# Altium PCB MAINSSMB V1.4 .PcbDoc (part 2 of 2)
Units mm, origin at the board's own origin, x right, y up, seen from the top; angles counter-clockwise.
Board outline 44.2 x 69.93 mm, 2 copper layers (Top Layer, Bottom Layer), stack 1.671 mm thick; 41 components, 30 nets, 189 pads, 41 vias.
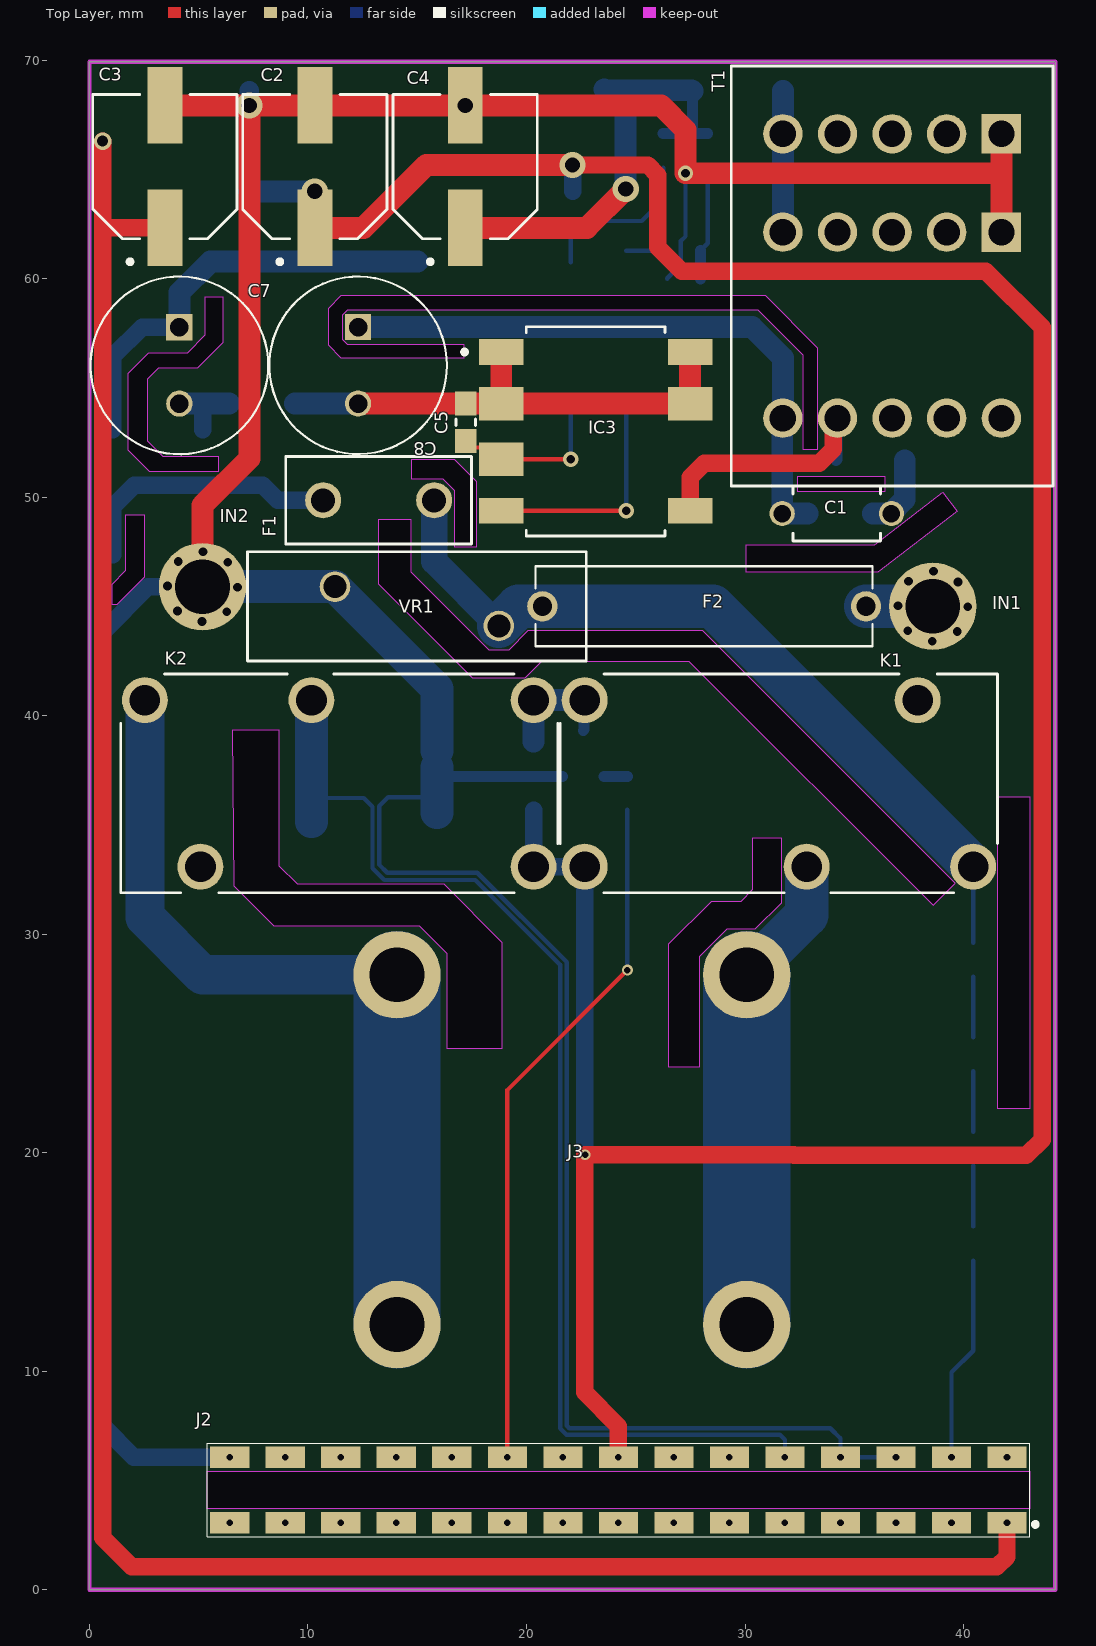
[diagram p0: Top Layer view]

## Part data (continued)
VR1: "Var MOV 275VAC/350VDC 4500A 430V Thru-Hole Radial Automotive Bulk", Manufacturer="TDK EPCOS", Manufacturer Part Number=B72214S0271K101, Supplier Part Number=495-1412-ND, Category=Varistors, ComponentLink1Description=https://datasheet.ciiva.com/11834/0900766b80188ddb-11834422.pdf?src-supplier=Rs, ComponentLink1URL=https://datasheet.ciiva.com/11834/0900766b80188ddb-11834422.pdf?src-supplier=Rs, ComponentLink2Description=https://datasheet.ciiva.com/4540/siov-leaded-standard-4540892.pdf?src-supplier=Mouser, ComponentLink2URL=https://datasheet.ciiva.com/4540/siov-leaded-standard-4540892.pdf?src-supplier=Mouser, ComponentLink3Description=https://datasheet.ciiva.com/1278/1899727-1278041.pdf?src-supplier=Element14, ComponentLink3URL=https://datasheet.ciiva.com/1278/1899727-1278041.pdf?src-supplier=Element14, Pricing="1=0.76, 10=0.46, 25=0.3804, 100=0.2902, 250=0.24588, 500=0.21856, 1000=0.19569, 2500=0.17105, 5000=0.15589 (USD)", RoHS=Yes, Stock=42424, Supplier=Digikey

## Via types
v1: diameter 0.5, hole 0.3, Top Layer to Bottom Layer, 32 vias
v2: diameter 1.2, hole 0.7, Top Layer to Bottom Layer, tented both sides, 5 vias
v3: diameter 0.7, hole 0.4, Top Layer to Bottom Layer, tented both sides, 3 vias
v4: diameter 0.8, hole 0.5, Top Layer to Bottom Layer, tented both sides, 1 vias

## Nets (pads, with @x,y where several pads share a name; then routed paths per layer and width w, separated by ;. In a path a pad name is that pad's centre, name@x,y a point inside that pad or via, vN(x,y) a via of type N, cw(c..) or ccw(c..) an arc to the next point about the centre after c; other vN are vias at no path point)
3V3-MAIN: C3.1 IC1.4 J2.01 | length 110.5
  Top Layer w0.8: v4(0.6,66.294) 0.6,62.281 ; C3.1 0.645,62.326 0.6,62.281 ; v1(41.986,3.071) 41.986,1.528 41.518,1.059 1.928,1.059 0.6,2.387 0.6,62.281
5V-MAIN: C2.1 D5.K IC1.3 IC7.3 J2.16 K1.A2 K2.A1 | length 136.4
  Top Layer w0.8: v2(22.106,65.202) 25.541,65.202 26.01,64.733 26.01,61.443 27.102,60.35 41.021,60.35 43.596,57.775 43.596,20.609 42.875,19.888 32.258,19.888 32.233,19.914 v1(22.682,19.914) 22.657,19.888 22.657,9.042 24.206,7.493 v1(24.206,6.071)
  Top Layer w1: v2(10.312,63.994) C2.1 12.542,62.326 15.418,65.202 v2(22.106,65.202)
  Bottom Layer w0.8: D5.K K2.A1 K1.A2 22.657,19.939 v1(22.682,19.914) ; IC7.3 v2(22.106,65.202)
  Bottom Layer w1: IC1.3 v2(10.312,63.994)
CUR-SHT-1: J2.10 K2.COM R17.2 R19.2 | length 54.9
  Bottom Layer w0.2: R19.2 10.16,35.529 10.87,36.239 12.554,36.239 12.954,35.839 12.954,33.02 13.487,32.487 17.653,32.487 21.537,28.603 21.537,7.394 21.829,7.101 31.596,7.101 31.826,6.871 v1(31.826,6.071)
  Bottom Layer w1.5: R19.2 10.16,36.239 R17.2 K2.COM
LEAK_INT: J2.18
  other v1: 21.666,6.071
NetC1_1: C1.1 D3.K R1.1 | length 3.5
  Bottom Layer w1: R1.1@35.862,49.251 C1.1 36.699,49.291 37.308,49.9 D3.K
NetC4_1: C4.1 D2.1 IC7.1 R2.2 R3.2 | length 20.7
  Top Layer w1: C4.1 22.76,62.326 v2(24.536,64.102)
  Bottom Layer w0.5: R2.2 R3.2 ; 27.598,66.675 D2.1
  Bottom Layer w1: IC7.1@23.554,68.67 23.599,68.625 24.46,68.625 ; v2(24.536,64.102) 24.536,68.549 24.46,68.625 ; D2.1 27.553,68.625 24.46,68.625
NetC5_1: C5.1 IC3.3 IC4.4 | length 8.1
  Top Layer w0.2: C5.1 17.53,52.273 18.316,52.273 IC3.3 v3(22.022,51.742)
  Bottom Layer w0.2: IC4.4 22.022,51.816 v3@22.073,51.765
NetC9_1: C9.1 IC4.2 IC5.2 | length 2.8
  Bottom Layer w0.2: IC4.2@24.562,61.282 C9.1 IC5.2
NetC9_2: C9.2 IC5.1 R3.1 R4.2 | length 5.3
  Bottom Layer w0.2: C9.2 28.292,61.622 IC5.1 R3.1
  Bottom Layer w0.5: R4.2 C9.2
NetD1_AC1: D1.AC1 F1.2 | length 12.5
  Bottom Layer w0.8: D1.AC1 1.074,49.563 2.057,50.546 7.925,50.546 8.611,49.86 F1.2
NetD2_2: D2.2 T1.5 | length 6.5
  Bottom Layer w1: T1.5@31.728,62.128 31.728,66.628 D2.2
NetD3_A: D3.A IC3.5 T1.7 | length 12.1
  Top Layer w0.8: IC3.5 27.483,50.916 28.126,51.559 33.394,51.559 34.037,52.202 34.037,53.427 T1.7
  Bottom Layer w0.5: D3.A 34.198,51.719 34.198,53.588 T1.7
NetD5_A: D5.A K1.A1 K2.A2 Q1.3 | length 5.6
  Bottom Layer w0.5: Q1.3 22.626,39.361 22.626,40.686 K1.A1
  Bottom Layer w1: D5.A K2.A2 K1.A1
NetF2_1: F2.1 IN1.1 | length 3.1
  Bottom Layer w2: F2.1 IN1.1@38.593,45.009
NetIC3_4: IC3.4 IC4.3 | length 11.2
  Top Layer w0.2: IC3.4 v3(24.562,49.38) ; v3@24.47,49.472 24.553,49.555 v3@24.689,49.555
  Bottom Layer w0.2: IC4.3 24.562,49.611 24.618,49.555 v3@24.689,49.555
NetIC4_1: IC4.1 R2.1 | length 7.8
  Bottom Layer w0.2: IC4.1 22.022,62.357 22.301,62.636 25.273,62.636 26.252,63.615 R2.1
NetJ3_1: J3.1 J3.3 K2.NO | length 38.6
  Bottom Layer w1.8: K2.NO 2.54,30.785 5.183,28.142 J3.1
  Bottom Layer w4: J3.3 J3.1
NetJ3_2: J3.2 J3.4 K1.COM | length 22.1
  Bottom Layer w2: J3.2 32.817,30.886 K1.COM
  Bottom Layer w4: J3.4 J3.2
NetQ1_1: Q1.1 R21.2 | length 1.1
  Bottom Layer w0.5: Q1.1 R21.2
NetR5_1: R5.1 R7.1 | length 2.8
  Bottom Layer w0.2: R5.1 R7.1
NetR5_2: R5.2 R6.1 | length 2.8
  Bottom Layer w0.2: R6.1 R5.2
NetR7_2: R7.2 R8.2 | length 2.8
  Bottom Layer w0.2: R7.2 R8.2
POWER-300V: C7.1 D1.POS L1.1 | length 20
  Bottom Layer w0.8: D1.POS 1.074,53.292 1.074,56.446 2.41,57.782 C7.1
  Bottom Layer w1: C7.1 4.115,59.36 5.537,60.782 L1.1
POWER-300V-R: C1.2 C8.1 L1.2 R1.2 T1.6 | length 28.3
  Bottom Layer w1: C8.1 12.295,57.784 15.01,57.784 L1.2 30.33,57.782 31.728,56.384 T1.6 ; T1.6@31.699,53.589 C1.2 R1.2@32.871,49.251
POWER-GND: C7.2 D1.NEG L2.1 | length 3.5
  Bottom Layer w0.8: D1.NEG 5.174,53.292 5.174,54.282
  Bottom Layer w1: C7.2 5.174,54.282 L2.1
POWER-GND-R: C5.2 C8.2 IC3.1 IC3.2 IC3.7 IC3.8 L2.2 | length 22.8
  Top Layer w1: C8.2 12.296,54.282 C5.2 IC3.2 ; IC3.1 IC3.2 ; IC3.8 IC3.7 IC3.2
  Bottom Layer w1: L2.2 9.402,54.285 C8.2
POWER_L: C2.2 C3.2 C4.2 D1.AC2 IC1.1 IC5.3 IC7.2 IN2.1 J2.06 J2.08 J2.30 Q1.2 R4.1 R17.1 R19.1 T1.1 VR1.1 | length 199.5
  Top Layer w1: C3.2 v2(7.317,67.926) ; IN2.1@5.174,45.909 5.174,49.624 7.317,51.767 v2(7.317,67.926) ; T1.1@41.728,62.128 41.728,64.846 ; T1.1@41.728,66.628 41.728,64.846 ; v2(7.317,67.926) C2.2 v2(17.196,67.926) 26.156,67.926 27.272,66.81 v3(27.272,64.827) 41.709,64.827 41.728,64.846
  Bottom Layer w0.2: R19.1 15.906,35.561 15.196,36.271 13.665,36.271 13.254,35.86 13.254,33.195 13.632,32.817 17.747,32.817 21.837,28.727 21.837,7.518 21.954,7.401 33.899,7.401 34.366,6.934 v1(34.366,6.071) v1(36.906,6.071) ; R17.1@15.906,37.643 R17.1 ; R4.1 26.442,60.025 27.06,60.643 27.06,61.723 27.272,61.935 v3(27.272,64.827)
  Bottom Layer w0.5: R17.1 16.287,38.024 16.287,37.39 16.466,37.211 Q1.2
  Bottom Layer w0.8: IN2.1@5.174,45.909 3.574,45.909 2.678,45.909 0.6,43.831 0.6,7.503 2.032,6.071 v1(6.426,6.071)
  Bottom Layer w0.9: v2(7.317,67.926) IC1.1
  Bottom Layer w1.5: IN2.1@6.774,45.909 VR1.1 15.906,41.239 R17.1 ; R19.1@15.906,35.561 15.906,36.271 R17.1@15.906,37.643
POWER_N: F1.1 F2.2 K1.NO R8.1 VR1.2 | length 37.5
  Bottom Layer w0.2: R8.1 K1.NO
  Bottom Layer w1.2: F1.1 15.773,47.071 VR1.2
  Bottom Layer w2: VR1.2 19.636,45.009 28.524,45.009 K1.NO
POWER_N_D: J2.04 R6.2 | length 9.4
  Bottom Layer w0.2: v1(39.446,6.071) 39.446,9.957 40.437,10.947 R6.2
RELAY: J2.20 R21.1 | length 31.9
  Top Layer w0.2: v1(19.126,6.071) 19.126,22.874 v1(24.613,28.36)
  Bottom Layer w0.2: v1(24.613,28.36) R21.1
pads on no net: IC1.2 J2.02 J2.03 J2.05 J2.07 J2.09 J2.11 J2.12 J2.13 J2.14 J2.15 J2.17 J2.19 J2.21 J2.22 J2.23 J2.24 J2.25 J2.26 J2.27 J2.28 J2.29 K1.NC K2.NC T1.2 T1.3 T1.4 T1.8 T1.9 T1.10
copper on no net:
  other v1: 6.426,3.071 8.966,3.071 11.506,3.071 14.046,3.071 16.586,3.071 19.126,3.071 21.666,3.071 24.206,3.071 26.746,3.071 29.286,3.071 31.826,3.071 34.366,3.071 36.906,3.071 39.446,3.071 8.966,6.071 11.506,6.071 14.046,6.071 16.586,6.071 26.746,6.071 29.286,6.071 41.986,6.071

## Keep-outs
Keep-Out Layer:
  the board outline again, w0.2

## Silkscreen, mask and mechanical layers (free items; w line width, h text height)
Bottom Overlay:
  drawing of 30 lines, arcs and shapes, not listed